# EAGLE board MAG3110_Breakout-Panel-v12 (EAGLE 7.5.0), part 1 of 6
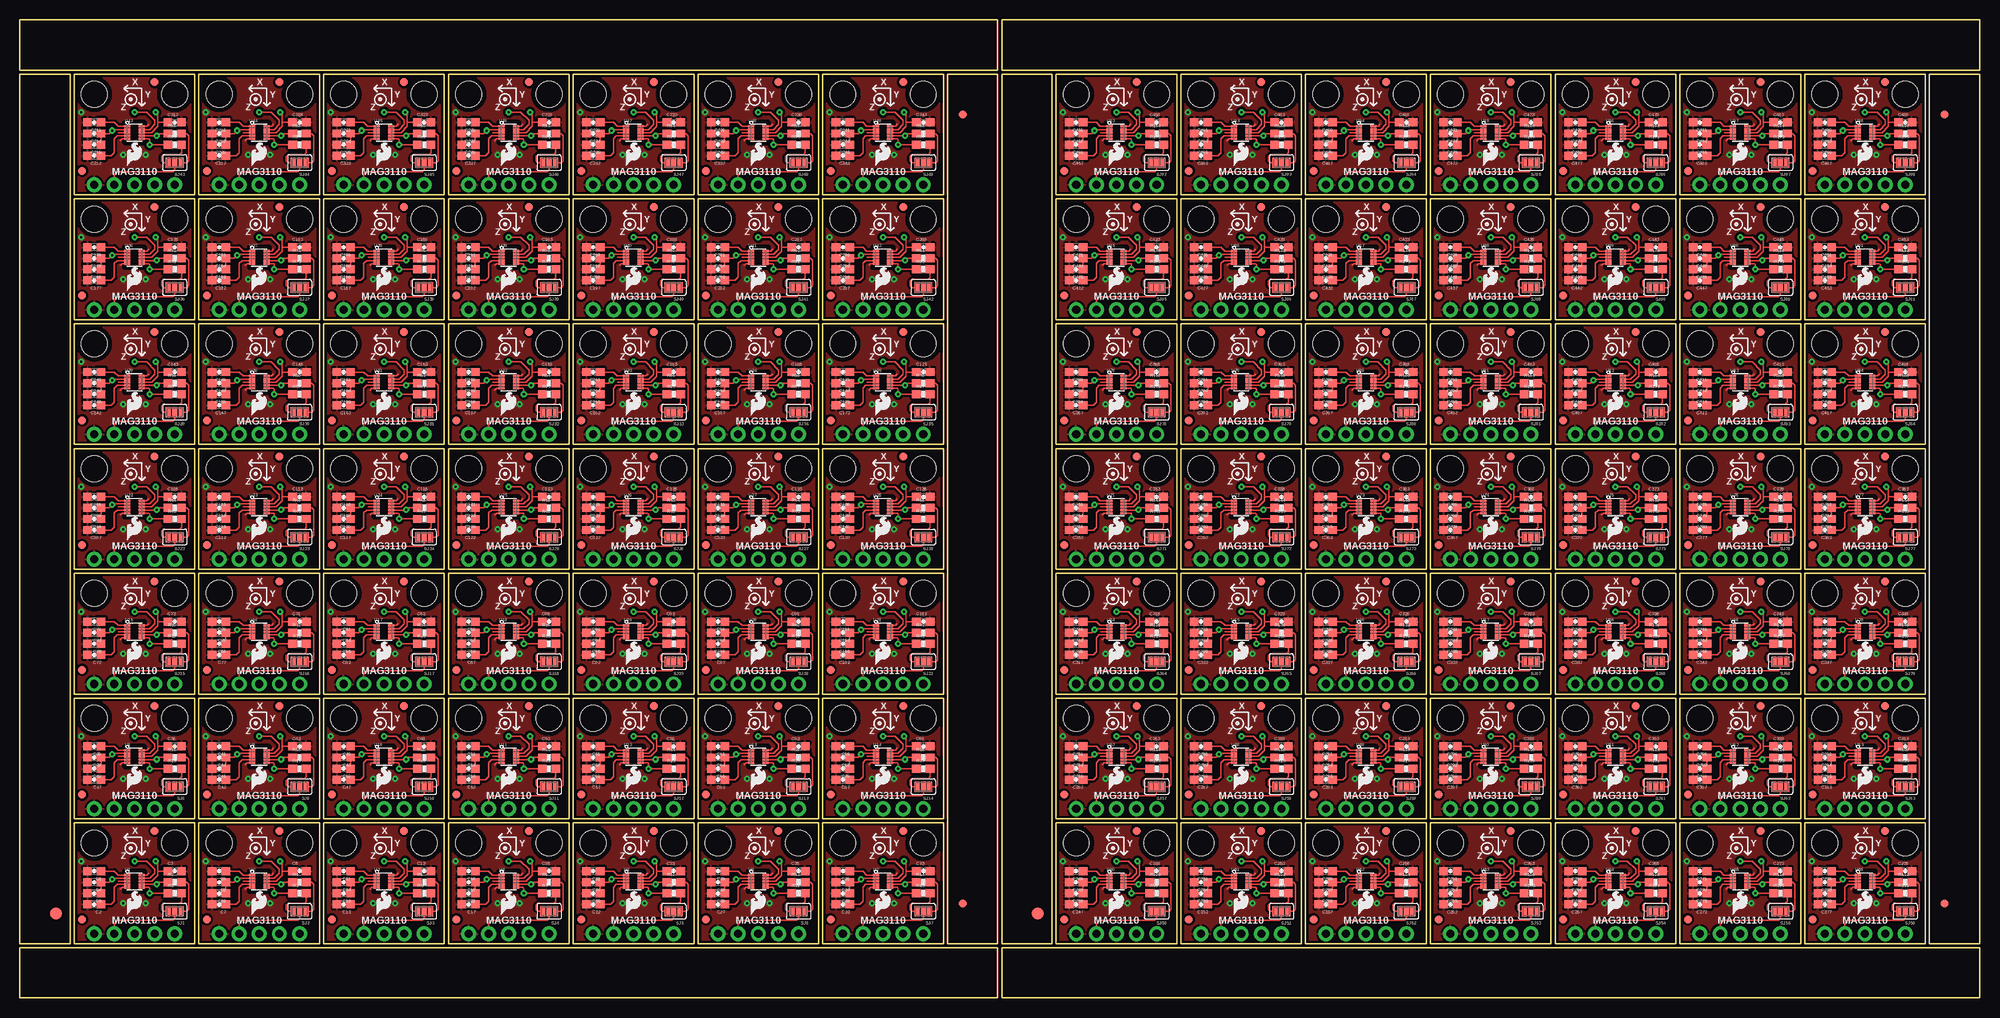
[diagram p0: board, top side]
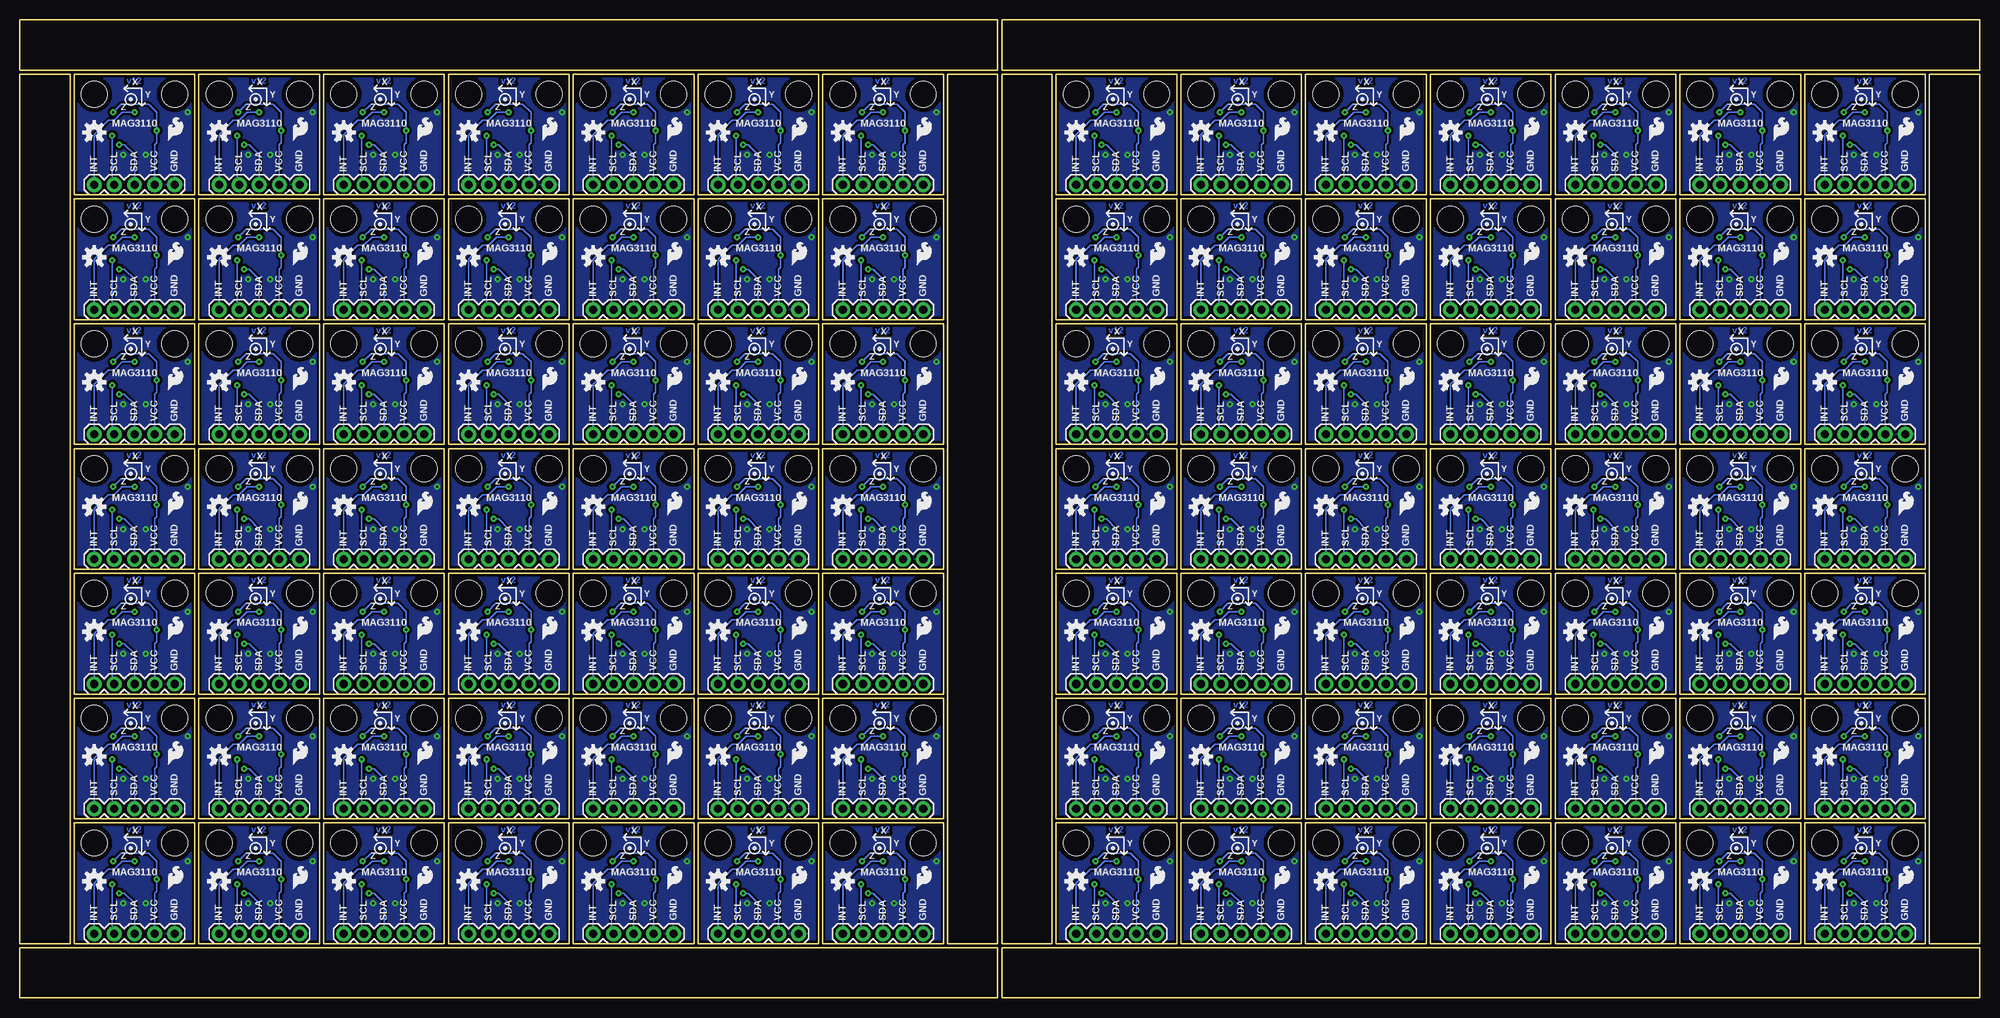
[diagram p1: board, bottom side, seen from below]

Size 247.4 x 123.44 mm. Coordinates in mm from the lower left corner, seen from the top.
Outline: 424 segments
Copper layers (1*16): Top 0.035mm / dielectric 1.5mm / Bottom 0.035mm
Design rules "SparkFun-2-layer *": minimum track width 7mil, minimum drill 10mil, track to track 8mil, track to pad 8mil, pad to pad 8mil, via to via 8mil, smd to smd 8mil, copper to edge 8mil, drill to drill 8mil, minimum pad ring 12mil, minimum via ring 10mil, stop-mask expansion 4mil, vias tented up to drill 20mil, thermal gap 10mil
tRestrict: area 14.1,13.7 to 14.9,15.7; area 13.2,15.9 to 15.7,16; area 13.2,13.5 to 15.7,13.6; area 29.8,13.7 to 30.6,15.7; area 29,15.9 to 31.5,16; area 29,13.5 to 31.5,13.6; area 45.6,13.7 to 46.4,15.7; area 44.7,15.9 to 47.2,16; area 44.7,13.5 to 47.2,13.6; area 61.3,13.7 to 62.1,15.7; area 60.5,15.9 to 63,16; area 60.5,13.5 to 63,13.6; 282 more areas

## Footprints (pad centres in the part's own frame; a part is rotated, then mirrored left to right if it is on the bottom)
0603-CAP = smd 1.1 x 1: 1 -0.85,0; 2 0.85,0
FIDUCIAL-1.5X3 = smd 1.5 x 1.5: 1 0,0
FIDUCIAL-1X2 = smd 1 x 1: 1 0,0
1X05 = drill 1.016 pad 1.88: 1 0,0; 2 2.54,0; 3 5.08,0; 4 7.62,0; 5 10.16,0
STAND-OFF = hole 3.302: 0,0
0603-RES = smd 1.1 x 1: 1 -0.85,0; 2 0.85,0
SJ_3_PASTE1&2&3 = smd 0.635 x 1.27: 1 -0.813,0; 2 0,0; 3 0.813,0
DFN-10-W = smd 0.762 x 0.279: 1 -0.91,0.787; 2 -0.91,0.381; 3 -0.91,0; 4 -0.91,-0.406; 5 -0.91,-0.787; 6 0.91,-0.787; 7 0.91,-0.406; 8 0.91,0; 9 0.91,0.381; 10 0.91,0.787

## Placement (x,y rotation side)
C1  0.1uF  [0603-CAP]  9.4,16 180 top
C2  0.1uF  [0603-CAP]  9.4,11.81 180 top
C3  0.1uF  [0603-CAP]  19.56,16 0 top
C4  1uF  [0603-CAP]  9.4,14.61 180 top
C5  0.1uF  [0603-CAP]  9.4,13.21 180 top
C6  0.1uF  [0603-CAP]  25.15,16 180 top
C7  0.1uF  [0603-CAP]  25.15,11.81 180 top
C8  0.1uF  [0603-CAP]  35.31,16 0 top
C9  1uF  [0603-CAP]  25.15,14.61 180 top
C10  0.1uF  [0603-CAP]  25.15,13.21 180 top
C11  0.1uF  [0603-CAP]  40.89,16 180 top
C12  0.1uF  [0603-CAP]  40.89,11.81 180 top
C13  0.1uF  [0603-CAP]  51.05,16 0 top
C14  1uF  [0603-CAP]  40.89,14.61 180 top
C15  0.1uF  [0603-CAP]  40.89,13.21 180 top
C16  0.1uF  [0603-CAP]  56.64,16 180 top
C17  0.1uF  [0603-CAP]  56.64,11.81 180 top
C18  0.1uF  [0603-CAP]  66.8,16 0 top
C19  1uF  [0603-CAP]  56.64,14.61 180 top
C20  0.1uF  [0603-CAP]  56.64,13.21 180 top
C21  0.1uF  [0603-CAP]  72.39,16 180 top
C22  0.1uF  [0603-CAP]  72.39,11.81 180 top
C23  0.1uF  [0603-CAP]  82.55,16 0 top
C24  1uF  [0603-CAP]  72.39,14.61 180 top
C25  0.1uF  [0603-CAP]  72.39,13.21 180 top
C26  0.1uF  [0603-CAP]  88.14,16 180 top
C27  0.1uF  [0603-CAP]  88.14,11.81 180 top
C28  0.1uF  [0603-CAP]  98.3,16 0 top
C29  1uF  [0603-CAP]  88.14,14.61 180 top
C30  0.1uF  [0603-CAP]  88.14,13.21 180 top
C31  0.1uF  [0603-CAP]  103.89,16 180 top
C32  0.1uF  [0603-CAP]  103.89,11.81 180 top
C33  0.1uF  [0603-CAP]  114.05,16 0 top
C34  1uF  [0603-CAP]  103.89,14.61 180 top
C35  0.1uF  [0603-CAP]  103.89,13.21 180 top
C36  0.1uF  [0603-CAP]  9.4,31.75 180 top
C37  0.1uF  [0603-CAP]  9.4,27.56 180 top
C38  0.1uF  [0603-CAP]  19.56,31.75 0 top
C39  1uF  [0603-CAP]  9.4,30.35 180 top
C40  0.1uF  [0603-CAP]  9.4,28.96 180 top
C41  0.1uF  [0603-CAP]  25.15,31.75 180 top
C42  0.1uF  [0603-CAP]  25.15,27.56 180 top
C43  0.1uF  [0603-CAP]  35.31,31.75 0 top
C44  1uF  [0603-CAP]  25.15,30.35 180 top
C45  0.1uF  [0603-CAP]  25.15,28.96 180 top
C46  0.1uF  [0603-CAP]  40.89,31.75 180 top
C47  0.1uF  [0603-CAP]  40.89,27.56 180 top
C48  0.1uF  [0603-CAP]  51.05,31.75 0 top
C49  1uF  [0603-CAP]  40.89,30.35 180 top
C50  0.1uF  [0603-CAP]  40.89,28.96 180 top
C51  0.1uF  [0603-CAP]  56.64,31.75 180 top
C52  0.1uF  [0603-CAP]  56.64,27.56 180 top
C53  0.1uF  [0603-CAP]  66.8,31.75 0 top
C54  1uF  [0603-CAP]  56.64,30.35 180 top
C55  0.1uF  [0603-CAP]  56.64,28.96 180 top
C56  0.1uF  [0603-CAP]  72.39,31.75 180 top
C57  0.1uF  [0603-CAP]  72.39,27.56 180 top
C58  0.1uF  [0603-CAP]  82.55,31.75 0 top
C59  1uF  [0603-CAP]  72.39,30.35 180 top
C60  0.1uF  [0603-CAP]  72.39,28.96 180 top
C61  0.1uF  [0603-CAP]  88.14,31.75 180 top
C62  0.1uF  [0603-CAP]  88.14,27.56 180 top
C63  0.1uF  [0603-CAP]  98.3,31.75 0 top
C64  1uF  [0603-CAP]  88.14,30.35 180 top
C65  0.1uF  [0603-CAP]  88.14,28.96 180 top
C66  0.1uF  [0603-CAP]  103.89,31.75 180 top
C67  0.1uF  [0603-CAP]  103.89,27.56 180 top
C68  0.1uF  [0603-CAP]  114.05,31.75 0 top
C69  1uF  [0603-CAP]  103.89,30.35 180 top
C70  0.1uF  [0603-CAP]  103.89,28.96 180 top
C71  0.1uF  [0603-CAP]  9.4,47.5 180 top
C72  0.1uF  [0603-CAP]  9.4,43.31 180 top
C73  0.1uF  [0603-CAP]  19.56,47.5 0 top
C74  1uF  [0603-CAP]  9.4,46.1 180 top
C75  0.1uF  [0603-CAP]  9.4,44.7 180 top
C76  0.1uF  [0603-CAP]  25.15,47.5 180 top
C77  0.1uF  [0603-CAP]  25.15,43.31 180 top
C78  0.1uF  [0603-CAP]  35.31,47.5 0 top
C79  1uF  [0603-CAP]  25.15,46.1 180 top
C80  0.1uF  [0603-CAP]  25.15,44.7 180 top
C81  0.1uF  [0603-CAP]  40.89,47.5 180 top
C82  0.1uF  [0603-CAP]  40.89,43.31 180 top
C83  0.1uF  [0603-CAP]  51.05,47.5 0 top
C84  1uF  [0603-CAP]  40.89,46.1 180 top
C85  0.1uF  [0603-CAP]  40.89,44.7 180 top
C86  0.1uF  [0603-CAP]  56.64,47.5 180 top
C87  0.1uF  [0603-CAP]  56.64,43.31 180 top
C88  0.1uF  [0603-CAP]  66.8,47.5 0 top
C89  1uF  [0603-CAP]  56.64,46.1 180 top
C90  0.1uF  [0603-CAP]  56.64,44.7 180 top
C91  0.1uF  [0603-CAP]  72.39,47.5 180 top
C92  0.1uF  [0603-CAP]  72.39,43.31 180 top
C93  0.1uF  [0603-CAP]  82.55,47.5 0 top
C94  1uF  [0603-CAP]  72.39,46.1 180 top
C95  0.1uF  [0603-CAP]  72.39,44.7 180 top
C96  0.1uF  [0603-CAP]  88.14,47.5 180 top
C97  0.1uF  [0603-CAP]  88.14,43.31 180 top
C98  0.1uF  [0603-CAP]  98.3,47.5 0 top
C99  1uF  [0603-CAP]  88.14,46.1 180 top
C100  0.1uF  [0603-CAP]  88.14,44.7 180 top
C101  0.1uF  [0603-CAP]  103.89,47.5 180 top
C102  0.1uF  [0603-CAP]  103.89,43.31 180 top
C103  0.1uF  [0603-CAP]  114.05,47.5 0 top
C104  1uF  [0603-CAP]  103.89,46.1 180 top
C105  0.1uF  [0603-CAP]  103.89,44.7 180 top
C106  0.1uF  [0603-CAP]  9.4,63.25 180 top
C107  0.1uF  [0603-CAP]  9.4,59.05 180 top
C108  0.1uF  [0603-CAP]  19.56,63.25 0 top
C109  1uF  [0603-CAP]  9.4,61.85 180 top
C110  0.1uF  [0603-CAP]  9.4,60.45 180 top
C111  0.1uF  [0603-CAP]  25.15,63.25 180 top
C112  0.1uF  [0603-CAP]  25.15,59.05 180 top
C113  0.1uF  [0603-CAP]  35.31,63.25 0 top
C114  1uF  [0603-CAP]  25.15,61.85 180 top
C115  0.1uF  [0603-CAP]  25.15,60.45 180 top
C116  0.1uF  [0603-CAP]  40.89,63.25 180 top
C117  0.1uF  [0603-CAP]  40.89,59.05 180 top
C118  0.1uF  [0603-CAP]  51.05,63.25 0 top
C119  1uF  [0603-CAP]  40.89,61.85 180 top
C120  0.1uF  [0603-CAP]  40.89,60.45 180 top
C121  0.1uF  [0603-CAP]  56.64,63.25 180 top
C122  0.1uF  [0603-CAP]  56.64,59.05 180 top
C123  0.1uF  [0603-CAP]  66.8,63.25 0 top
C124  1uF  [0603-CAP]  56.64,61.85 180 top
C125  0.1uF  [0603-CAP]  56.64,60.45 180 top
C126  0.1uF  [0603-CAP]  72.39,63.25 180 top
C127  0.1uF  [0603-CAP]  72.39,59.05 180 top
C128  0.1uF  [0603-CAP]  82.55,63.25 0 top
C129  1uF  [0603-CAP]  72.39,61.85 180 top
C130  0.1uF  [0603-CAP]  72.39,60.45 180 top
C131  0.1uF  [0603-CAP]  88.14,63.25 180 top
C132  0.1uF  [0603-CAP]  88.14,59.05 180 top
C133  0.1uF  [0603-CAP]  98.3,63.25 0 top
C134  1uF  [0603-CAP]  88.14,61.85 180 top
C135  0.1uF  [0603-CAP]  88.14,60.45 180 top
C136  0.1uF  [0603-CAP]  103.89,63.25 180 top
C137  0.1uF  [0603-CAP]  103.89,59.05 180 top
C138  0.1uF  [0603-CAP]  114.05,63.25 0 top
C139  1uF  [0603-CAP]  103.89,61.85 180 top
C140  0.1uF  [0603-CAP]  103.89,60.45 180 top
C141  0.1uF  [0603-CAP]  9.4,78.99 180 top
C142  0.1uF  [0603-CAP]  9.4,74.8 180 top
C143  0.1uF  [0603-CAP]  19.56,78.99 0 top
C144  1uF  [0603-CAP]  9.4,77.6 180 top
C145  0.1uF  [0603-CAP]  9.4,76.2 180 top
C146  0.1uF  [0603-CAP]  25.15,78.99 180 top
C147  0.1uF  [0603-CAP]  25.15,74.8 180 top
C148  0.1uF  [0603-CAP]  35.31,78.99 0 top
C149  1uF  [0603-CAP]  25.15,77.6 180 top
C150  0.1uF  [0603-CAP]  25.15,76.2 180 top
C151  0.1uF  [0603-CAP]  40.89,78.99 180 top
C152  0.1uF  [0603-CAP]  40.89,74.8 180 top
C153  0.1uF  [0603-CAP]  51.05,78.99 0 top
C154  1uF  [0603-CAP]  40.89,77.6 180 top
C155  0.1uF  [0603-CAP]  40.89,76.2 180 top
C156  0.1uF  [0603-CAP]  56.64,78.99 180 top
C157  0.1uF  [0603-CAP]  56.64,74.8 180 top
C158  0.1uF  [0603-CAP]  66.8,78.99 0 top
C159  1uF  [0603-CAP]  56.64,77.6 180 top
C160  0.1uF  [0603-CAP]  56.64,76.2 180 top
C161  0.1uF  [0603-CAP]  72.39,78.99 180 top
C162  0.1uF  [0603-CAP]  72.39,74.8 180 top
C163  0.1uF  [0603-CAP]  82.55,78.99 0 top
C164  1uF  [0603-CAP]  72.39,77.6 180 top
C165  0.1uF  [0603-CAP]  72.39,76.2 180 top
C166  0.1uF  [0603-CAP]  88.14,78.99 180 top
C167  0.1uF  [0603-CAP]  88.14,74.8 180 top
C168  0.1uF  [0603-CAP]  98.3,78.99 0 top
C169  1uF  [0603-CAP]  88.14,77.6 180 top
C170  0.1uF  [0603-CAP]  88.14,76.2 180 top
C171  0.1uF  [0603-CAP]  103.89,78.99 180 top
C172  0.1uF  [0603-CAP]  103.89,74.8 180 top
C173  0.1uF  [0603-CAP]  114.05,78.99 0 top
C174  1uF  [0603-CAP]  103.89,77.6 180 top
C175  0.1uF  [0603-CAP]  103.89,76.2 180 top
C176  0.1uF  [0603-CAP]  9.4,94.74 180 top
C177  0.1uF  [0603-CAP]  9.4,90.55 180 top
C178  0.1uF  [0603-CAP]  19.56,94.74 0 top
C179  1uF  [0603-CAP]  9.4,93.34 180 top
C180  0.1uF  [0603-CAP]  9.4,91.95 180 top
C181  0.1uF  [0603-CAP]  25.15,94.74 180 top
C182  0.1uF  [0603-CAP]  25.15,90.55 180 top
C183  0.1uF  [0603-CAP]  35.31,94.74 0 top
C184  1uF  [0603-CAP]  25.15,93.34 180 top
C185  0.1uF  [0603-CAP]  25.15,91.95 180 top
C186  0.1uF  [0603-CAP]  40.89,94.74 180 top
C187  0.1uF  [0603-CAP]  40.89,90.55 180 top
C188  0.1uF  [0603-CAP]  51.05,94.74 0 top
C189  1uF  [0603-CAP]  40.89,93.34 180 top
C190  0.1uF  [0603-CAP]  40.89,91.95 180 top
C191  0.1uF  [0603-CAP]  56.64,94.74 180 top
C192  0.1uF  [0603-CAP]  56.64,90.55 180 top
C193  0.1uF  [0603-CAP]  66.8,94.74 0 top
C194  1uF  [0603-CAP]  56.64,93.34 180 top
C195  0.1uF  [0603-CAP]  56.64,91.95 180 top
C196  0.1uF  [0603-CAP]  72.39,94.74 180 top
C197  0.1uF  [0603-CAP]  72.39,90.55 180 top
C198  0.1uF  [0603-CAP]  82.55,94.74 0 top
C199  1uF  [0603-CAP]  72.39,93.34 180 top
C200  0.1uF  [0603-CAP]  72.39,91.95 180 top
C201  0.1uF  [0603-CAP]  88.14,94.74 180 top
C202  0.1uF  [0603-CAP]  88.14,90.55 180 top
C203  0.1uF  [0603-CAP]  98.3,94.74 0 top
C204  1uF  [0603-CAP]  88.14,93.34 180 top
C205  0.1uF  [0603-CAP]  88.14,91.95 180 top
C206  0.1uF  [0603-CAP]  103.89,94.74 180 top
C207  0.1uF  [0603-CAP]  103.89,90.55 180 top
C208  0.1uF  [0603-CAP]  114.05,94.74 0 top
C209  1uF  [0603-CAP]  103.89,93.34 180 top
C210  0.1uF  [0603-CAP]  103.89,91.95 180 top
C211  0.1uF  [0603-CAP]  9.4,110.49 180 top
C212  0.1uF  [0603-CAP]  9.4,106.3 180 top
C213  0.1uF  [0603-CAP]  19.56,110.49 0 top
C214  1uF  [0603-CAP]  9.4,109.09 180 top
C215  0.1uF  [0603-CAP]  9.4,107.7 180 top
C216  0.1uF  [0603-CAP]  25.15,110.49 180 top
C217  0.1uF  [0603-CAP]  25.15,106.3 180 top
C218  0.1uF  [0603-CAP]  35.31,110.49 0 top
C219  1uF  [0603-CAP]  25.15,109.09 180 top
C220  0.1uF  [0603-CAP]  25.15,107.7 180 top
C221  0.1uF  [0603-CAP]  40.89,110.49 180 top
C222  0.1uF  [0603-CAP]  40.89,106.3 180 top
C223  0.1uF  [0603-CAP]  51.05,110.49 0 top
C224  1uF  [0603-CAP]  40.89,109.09 180 top
C225  0.1uF  [0603-CAP]  40.89,107.7 180 top
C226  0.1uF  [0603-CAP]  56.64,110.49 180 top
C227  0.1uF  [0603-CAP]  56.64,106.3 180 top
C228  0.1uF  [0603-CAP]  66.8,110.49 0 top
C229  1uF  [0603-CAP]  56.64,109.09 180 top
C230  0.1uF  [0603-CAP]  56.64,107.7 180 top
C231  0.1uF  [0603-CAP]  72.39,110.49 180 top
C232  0.1uF  [0603-CAP]  72.39,106.3 180 top
C233  0.1uF  [0603-CAP]  82.55,110.49 0 top
C234  1uF  [0603-CAP]  72.39,109.09 180 top
C235  0.1uF  [0603-CAP]  72.39,107.7 180 top
C236  0.1uF  [0603-CAP]  88.14,110.49 180 top
C237  0.1uF  [0603-CAP]  88.14,106.3 180 top
C238  0.1uF  [0603-CAP]  98.3,110.49 0 top
C239  1uF  [0603-CAP]  88.14,109.09 180 top
C240  0.1uF  [0603-CAP]  88.14,107.7 180 top
C241  0.1uF  [0603-CAP]  103.89,110.49 180 top
C242  0.1uF  [0603-CAP]  103.89,106.3 180 top
C243  0.1uF  [0603-CAP]  114.05,110.49 0 top
C244  1uF  [0603-CAP]  103.89,109.09 180 top
C245  0.1uF  [0603-CAP]  103.89,107.7 180 top
C246  0.1uF  [0603-CAP]  133.35,16 180 top
C247  0.1uF  [0603-CAP]  133.35,11.81 180 top
C248  0.1uF  [0603-CAP]  143.51,16 0 top
C249  1uF  [0603-CAP]  133.35,14.61 180 top
C250  0.1uF  [0603-CAP]  133.35,13.21 180 top
C251  0.1uF  [0603-CAP]  149.1,16 180 top
C252  0.1uF  [0603-CAP]  149.1,11.81 180 top
C253  0.1uF  [0603-CAP]  159.26,16 0 top
C254  1uF  [0603-CAP]  149.1,14.61 180 top
C255  0.1uF  [0603-CAP]  149.1,13.21 180 top
C256  0.1uF  [0603-CAP]  164.85,16 180 top
C257  0.1uF  [0603-CAP]  164.85,11.81 180 top
C258  0.1uF  [0603-CAP]  175.01,16 0 top
C259  1uF  [0603-CAP]  164.85,14.61 180 top
C260  0.1uF  [0603-CAP]  164.85,13.21 180 top
C261  0.1uF  [0603-CAP]  180.59,16 180 top
C262  0.1uF  [0603-CAP]  180.59,11.81 180 top
C263  0.1uF  [0603-CAP]  190.75,16 0 top
C264  1uF  [0603-CAP]  180.59,14.61 180 top
C265  0.1uF  [0603-CAP]  180.59,13.21 180 top
C266  0.1uF  [0603-CAP]  196.34,16 180 top
C267  0.1uF  [0603-CAP]  196.34,11.81 180 top
C268  0.1uF  [0603-CAP]  206.5,16 0 top
C269  1uF  [0603-CAP]  196.34,14.61 180 top
C270  0.1uF  [0603-CAP]  196.34,13.21 180 top
C271  0.1uF  [0603-CAP]  212.09,16 180 top
C272  0.1uF  [0603-CAP]  212.09,11.81 180 top
C273  0.1uF  [0603-CAP]  222.25,16 0 top
C274  1uF  [0603-CAP]  212.09,14.61 180 top
C275  0.1uF  [0603-CAP]  212.09,13.21 180 top
C276  0.1uF  [0603-CAP]  227.84,16 180 top
C277  0.1uF  [0603-CAP]  227.84,11.81 180 top
C278  0.1uF  [0603-CAP]  238,16 0 top
C279  1uF  [0603-CAP]  227.84,14.61 180 top
C280  0.1uF  [0603-CAP]  227.84,13.21 180 top
C281  0.1uF  [0603-CAP]  133.35,31.75 180 top
C282  0.1uF  [0603-CAP]  133.35,27.56 180 top
C283  0.1uF  [0603-CAP]  143.51,31.75 0 top
C284  1uF  [0603-CAP]  133.35,30.35 180 top
C285  0.1uF  [0603-CAP]  133.35,28.96 180 top
C286  0.1uF  [0603-CAP]  149.1,31.75 180 top
C287  0.1uF  [0603-CAP]  149.1,27.56 180 top
C288  0.1uF  [0603-CAP]  159.26,31.75 0 top
C289  1uF  [0603-CAP]  149.1,30.35 180 top
C290  0.1uF  [0603-CAP]  149.1,28.96 180 top
C291  0.1uF  [0603-CAP]  164.85,31.75 180 top
C292  0.1uF  [0603-CAP]  164.85,27.56 180 top
C293  0.1uF  [0603-CAP]  175.01,31.75 0 top
C294  1uF  [0603-CAP]  164.85,30.35 180 top
C295  0.1uF  [0603-CAP]  164.85,28.96 180 top
C296  0.1uF  [0603-CAP]  180.59,31.75 180 top
C297  0.1uF  [0603-CAP]  180.59,27.56 180 top
C298  0.1uF  [0603-CAP]  190.75,31.75 0 top
C299  1uF  [0603-CAP]  180.59,30.35 180 top
C300  0.1uF  [0603-CAP]  180.59,28.96 180 top
C301  0.1uF  [0603-CAP]  196.34,31.75 180 top
C302  0.1uF  [0603-CAP]  196.34,27.56 180 top
C303  0.1uF  [0603-CAP]  206.5,31.75 0 top
C304  1uF  [0603-CAP]  196.34,30.35 180 top
C305  0.1uF  [0603-CAP]  196.34,28.96 180 top
C306  0.1uF  [0603-CAP]  212.09,31.75 180 top
C307  0.1uF  [0603-CAP]  212.09,27.56 180 top
C308  0.1uF  [0603-CAP]  222.25,31.75 0 top
C309  1uF  [0603-CAP]  212.09,30.35 180 top
C310  0.1uF  [0603-CAP]  212.09,28.96 180 top
C311  0.1uF  [0603-CAP]  227.84,31.75 180 top
C312  0.1uF  [0603-CAP]  227.84,27.56 180 top
C313  0.1uF  [0603-CAP]  238,31.75 0 top
C314  1uF  [0603-CAP]  227.84,30.35 180 top
C315  0.1uF  [0603-CAP]  227.84,28.96 180 top
C316  0.1uF  [0603-CAP]  133.35,47.5 180 top
C317  0.1uF  [0603-CAP]  133.35,43.31 180 top
C318  0.1uF  [0603-CAP]  143.51,47.5 0 top
C319  1uF  [0603-CAP]  133.35,46.1 180 top
C320  0.1uF  [0603-CAP]  133.35,44.7 180 top
C321  0.1uF  [0603-CAP]  149.1,47.5 180 top
C322  0.1uF  [0603-CAP]  149.1,43.31 180 top
C323  0.1uF  [0603-CAP]  159.26,47.5 0 top
C324  1uF  [0603-CAP]  149.1,46.1 180 top
C325  0.1uF  [0603-CAP]  149.1,44.7 180 top
C326  0.1uF  [0603-CAP]  164.85,47.5 180 top
C327  0.1uF  [0603-CAP]  164.85,43.31 180 top
C328  0.1uF  [0603-CAP]  175.01,47.5 0 top
C329  1uF  [0603-CAP]  164.85,46.1 180 top
C330  0.1uF  [0603-CAP]  164.85,44.7 180 top
C331  0.1uF  [0603-CAP]  180.59,47.5 180 top
C332  0.1uF  [0603-CAP]  180.59,43.31 180 top
C333  0.1uF  [0603-CAP]  190.75,47.5 0 top
C334  1uF  [0603-CAP]  180.59,46.1 180 top
C335  0.1uF  [0603-CAP]  180.59,44.7 180 top
C336  0.1uF  [0603-CAP]  196.34,47.5 180 top
C337  0.1uF  [0603-CAP]  196.34,43.31 180 top
C338  0.1uF  [0603-CAP]  206.5,47.5 0 top
C339  1uF  [0603-CAP]  196.34,46.1 180 top
C340  0.1uF  [0603-CAP]  196.34,44.7 180 top
C341  0.1uF  [0603-CAP]  212.09,47.5 180 top
C342  0.1uF  [0603-CAP]  212.09,43.31 180 top
C343  0.1uF  [0603-CAP]  222.25,47.5 0 top
C344  1uF  [0603-CAP]  212.09,46.1 180 top
C345  0.1uF  [0603-CAP]  212.09,44.7 180 top
C346  0.1uF  [0603-CAP]  227.84,47.5 180 top
C347  0.1uF  [0603-CAP]  227.84,43.31 180 top
C348  0.1uF  [0603-CAP]  238,47.5 0 top
C349  1uF  [0603-CAP]  227.84,46.1 180 top
C350  0.1uF  [0603-CAP]  227.84,44.7 180 top
C351  0.1uF  [0603-CAP]  133.35,63.25 180 top
C352  0.1uF  [0603-CAP]  133.35,59.05 180 top
C353  0.1uF  [0603-CAP]  143.51,63.25 0 top
C354  1uF  [0603-CAP]  133.35,61.85 180 top
C355  0.1uF  [0603-CAP]  133.35,60.45 180 top
C356  0.1uF  [0603-CAP]  149.1,63.25 180 top
C357  0.1uF  [0603-CAP]  149.1,59.05 180 top
C358  0.1uF  [0603-CAP]  159.26,63.25 0 top
C359  1uF  [0603-CAP]  149.1,61.85 180 top
C360  0.1uF  [0603-CAP]  149.1,60.45 180 top
C361  0.1uF  [0603-CAP]  164.85,63.25 180 top
C362  0.1uF  [0603-CAP]  164.85,59.05 180 top
C363  0.1uF  [0603-CAP]  175.01,63.25 0 top
C364  1uF  [0603-CAP]  164.85,61.85 180 top
C365  0.1uF  [0603-CAP]  164.85,60.45 180 top
C366  0.1uF  [0603-CAP]  180.59,63.25 180 top
C367  0.1uF  [0603-CAP]  180.59,59.05 180 top
C368  0.1uF  [0603-CAP]  190.75,63.25 0 top
C369  1uF  [0603-CAP]  180.59,61.85 180 top
C370  0.1uF  [0603-CAP]  180.59,60.45 180 top
C371  0.1uF  [0603-CAP]  196.34,63.25 180 top
C372  0.1uF  [0603-CAP]  196.34,59.05 180 top
C373  0.1uF  [0603-CAP]  206.5,63.25 0 top
C374  1uF  [0603-CAP]  196.34,61.85 180 top
C375  0.1uF  [0603-CAP]  196.34,60.45 180 top
C376  0.1uF  [0603-CAP]  212.09,63.25 180 top
C377  0.1uF  [0603-CAP]  212.09,59.05 180 top
C378  0.1uF  [0603-CAP]  222.25,63.25 0 top
C379  1uF  [0603-CAP]  212.09,61.85 180 top
C380  0.1uF  [0603-CAP]  212.09,60.45 180 top
C381  0.1uF  [0603-CAP]  227.84,63.25 180 top
C382  0.1uF  [0603-CAP]  227.84,59.05 180 top
C383  0.1uF  [0603-CAP]  238,63.25 0 top
C384  1uF  [0603-CAP]  227.84,61.85 180 top
C385  0.1uF  [0603-CAP]  227.84,60.45 180 top
C386  0.1uF  [0603-CAP]  133.35,78.99 180 top
C387  0.1uF  [0603-CAP]  133.35,74.8 180 top
C388  0.1uF  [0603-CAP]  143.51,78.99 0 top
C389  1uF  [0603-CAP]  133.35,77.6 180 top
C390  0.1uF  [0603-CAP]  133.35,76.2 180 top
C391  0.1uF  [0603-CAP]  149.1,78.99 180 top
C392  0.1uF  [0603-CAP]  149.1,74.8 180 top
C393  0.1uF  [0603-CAP]  159.26,78.99 0 top
C394  1uF  [0603-CAP]  149.1,77.6 180 top
C395  0.1uF  [0603-CAP]  149.1,76.2 180 top
C396  0.1uF  [0603-CAP]  164.85,78.99 180 top
C397  0.1uF  [0603-CAP]  164.85,74.8 180 top
C398  0.1uF  [0603-CAP]  175.01,78.99 0 top
C399  1uF  [0603-CAP]  164.85,77.6 180 top
C400  0.1uF  [0603-CAP]  164.85,76.2 180 top
C401  0.1uF  [0603-CAP]  180.59,78.99 180 top
C402  0.1uF  [0603-CAP]  180.59,74.8 180 top
C403  0.1uF  [0603-CAP]  190.75,78.99 0 top
C404  1uF  [0603-CAP]  180.59,77.6 180 top
C405  0.1uF  [0603-CAP]  180.59,76.2 180 top
C406  0.1uF  [0603-CAP]  196.34,78.99 180 top
C407  0.1uF  [0603-CAP]  196.34,74.8 180 top
C408  0.1uF  [0603-CAP]  206.5,78.99 0 top
C409  1uF  [0603-CAP]  196.34,77.6 180 top
C410  0.1uF  [0603-CAP]  196.34,76.2 180 top
C411  0.1uF  [0603-CAP]  212.09,78.99 180 top
C412  0.1uF  [0603-CAP]  212.09,74.8 180 top
C413  0.1uF  [0603-CAP]  222.25,78.99 0 top
C414  1uF  [0603-CAP]  212.09,77.6 180 top
C415  0.1uF  [0603-CAP]  212.09,76.2 180 top
C416  0.1uF  [0603-CAP]  227.84,78.99 180 top
C417  0.1uF  [0603-CAP]  227.84,74.8 180 top
C418  0.1uF  [0603-CAP]  238,78.99 0 top
C419  1uF  [0603-CAP]  227.84,77.6 180 top
C420  0.1uF  [0603-CAP]  227.84,76.2 180 top
C421  0.1uF  [0603-CAP]  133.35,94.74 180 top
C422  0.1uF  [0603-CAP]  133.35,90.55 180 top
C423  0.1uF  [0603-CAP]  143.51,94.74 0 top
C424  1uF  [0603-CAP]  133.35,93.34 180 top
C425  0.1uF  [0603-CAP]  133.35,91.95 180 top
C426  0.1uF  [0603-CAP]  149.1,94.74 180 top
C427  0.1uF  [0603-CAP]  149.1,90.55 180 top
C428  0.1uF  [0603-CAP]  159.26,94.74 0 top
C429  1uF  [0603-CAP]  149.1,93.34 180 top
C430  0.1uF  [0603-CAP]  149.1,91.95 180 top
C431  0.1uF  [0603-CAP]  164.85,94.74 180 top
C432  0.1uF  [0603-CAP]  164.85,90.55 180 top
C433  0.1uF  [0603-CAP]  175.01,94.74 0 top
C434  1uF  [0603-CAP]  164.85,93.34 180 top
C435  0.1uF  [0603-CAP]  164.85,91.95 180 top
C436  0.1uF  [0603-CAP]  180.59,94.74 180 top
C437  0.1uF  [0603-CAP]  180.59,90.55 180 top
C438  0.1uF  [0603-CAP]  190.75,94.74 0 top
C439  1uF  [0603-CAP]  180.59,93.34 180 top
C440  0.1uF  [0603-CAP]  180.59,91.95 180 top
C441  0.1uF  [0603-CAP]  196.34,94.74 180 top
C442  0.1uF  [0603-CAP]  196.34,90.55 180 top
C443  0.1uF  [0603-CAP]  206.5,94.74 0 top
C444  1uF  [0603-CAP]  196.34,93.34 180 top
C445  0.1uF  [0603-CAP]  196.34,91.95 180 top
C446  0.1uF  [0603-CAP]  212.09,94.74 180 top
C447  0.1uF  [0603-CAP]  212.09,90.55 180 top
C448  0.1uF  [0603-CAP]  222.25,94.74 0 top
C449  1uF  [0603-CAP]  212.09,93.34 180 top
C450  0.1uF  [0603-CAP]  212.09,91.95 180 top
C451  0.1uF  [0603-CAP]  227.84,94.74 180 top
C452  0.1uF  [0603-CAP]  227.84,90.55 180 top
C453  0.1uF  [0603-CAP]  238,94.74 0 top
C454  1uF  [0603-CAP]  227.84,93.34 180 top
C455  0.1uF  [0603-CAP]  227.84,91.95 180 top
C456  0.1uF  [0603-CAP]  133.35,110.49 180 top
C457  0.1uF  [0603-CAP]  133.35,106.3 180 top
C458  0.1uF  [0603-CAP]  143.51,110.49 0 top
C459  1uF  [0603-CAP]  133.35,109.09 180 top
C460  0.1uF  [0603-CAP]  133.35,107.7 180 top
C461  0.1uF  [0603-CAP]  149.1,110.49 180 top
C462  0.1uF  [0603-CAP]  149.1,106.3 180 top
C463  0.1uF  [0603-CAP]  159.26,110.49 0 top
C464  1uF  [0603-CAP]  149.1,109.09 180 top
C465  0.1uF  [0603-CAP]  149.1,107.7 180 top
C466  0.1uF  [0603-CAP]  164.85,110.49 180 top
C467  0.1uF  [0603-CAP]  164.85,106.3 180 top
C468  0.1uF  [0603-CAP]  175.01,110.49 0 top
C469  1uF  [0603-CAP]  164.85,109.09 180 top
C470  0.1uF  [0603-CAP]  164.85,107.7 180 top
C471  0.1uF  [0603-CAP]  180.59,110.49 180 top
C472  0.1uF  [0603-CAP]  180.59,106.3 180 top
C473  0.1uF  [0603-CAP]  190.75,110.49 0 top
C474  1uF  [0603-CAP]  180.59,109.09 180 top
C475  0.1uF  [0603-CAP]  180.59,107.7 180 top
C476  0.1uF  [0603-CAP]  196.34,110.49 180 top
C477  0.1uF  [0603-CAP]  196.34,106.3 180 top
C478  0.1uF  [0603-CAP]  206.5,110.49 0 top
C479  1uF  [0603-CAP]  196.34,109.09 180 top
C480  0.1uF  [0603-CAP]  196.34,107.7 180 top
C481  0.1uF  [0603-CAP]  212.09,110.49 180 top
C482  0.1uF  [0603-CAP]  212.09,106.3 180 top
C483  0.1uF  [0603-CAP]  222.25,110.49 0 top
C484  1uF  [0603-CAP]  212.09,109.09 180 top
C485  0.1uF  [0603-CAP]  212.09,107.7 180 top
C486  0.1uF  [0603-CAP]  227.84,110.49 180 top
C487  0.1uF  [0603-CAP]  227.84,106.3 180 top
C488  0.1uF  [0603-CAP]  238,110.49 0 top
C489  1uF  [0603-CAP]  227.84,109.09 180 top
C490  0.1uF  [0603-CAP]  227.84,107.7 180 top
E$1  [FIDUCIAL-1.5X3]  4.57,10.67 0 top
E$2  [FIDUCIAL-1X2]  242.95,11.94 0 top
E$3  [FIDUCIAL-1X2]  242.95,111.51 180 top
E$4  [FIDUCIAL-1X2]  119,11.94 0 top
E$5  [FIDUCIAL-1.5X3]  128.52,10.67 0 top
E$6  [FIDUCIAL-1X2]  119,111.51 180 top
FID1  FIDUCIAL1X2  [FIDUCIAL-1X2]  7.87,9.91 0 top
FID2  FIDUCIAL1X2  [FIDUCIAL-1X2]  17.02,21.08 0 top
FID3  FIDUCIAL1X2  [FIDUCIAL-1X2]  23.62,9.91 0 top
FID4  FIDUCIAL1X2  [FIDUCIAL-1X2]  32.77,21.08 0 top
FID5  FIDUCIAL1X2  [FIDUCIAL-1X2]  39.37,9.91 0 top
FID6  FIDUCIAL1X2  [FIDUCIAL-1X2]  48.51,21.08 0 top
FID7  FIDUCIAL1X2  [FIDUCIAL-1X2]  55.12,9.91 0 top
FID8  FIDUCIAL1X2  [FIDUCIAL-1X2]  64.26,21.08 0 top
FID9  FIDUCIAL1X2  [FIDUCIAL-1X2]  70.87,9.91 0 top
FID10  FIDUCIAL1X2  [FIDUCIAL-1X2]  80.01,21.08 0 top
FID11  FIDUCIAL1X2  [FIDUCIAL-1X2]  86.61,9.91 0 top
FID12  FIDUCIAL1X2  [FIDUCIAL-1X2]  95.76,21.08 0 top
FID13  FIDUCIAL1X2  [FIDUCIAL-1X2]  102.36,9.91 0 top
FID14  FIDUCIAL1X2  [FIDUCIAL-1X2]  111.51,21.08 0 top
FID15  FIDUCIAL1X2  [FIDUCIAL-1X2]  7.87,25.65 0 top
FID16  FIDUCIAL1X2  [FIDUCIAL-1X2]  17.02,36.83 0 top
FID17  FIDUCIAL1X2  [FIDUCIAL-1X2]  23.62,25.65 0 top
FID18  FIDUCIAL1X2  [FIDUCIAL-1X2]  32.77,36.83 0 top
FID19  FIDUCIAL1X2  [FIDUCIAL-1X2]  39.37,25.65 0 top
FID20  FIDUCIAL1X2  [FIDUCIAL-1X2]  48.51,36.83 0 top
FID21  FIDUCIAL1X2  [FIDUCIAL-1X2]  55.12,25.65 0 top
FID22  FIDUCIAL1X2  [FIDUCIAL-1X2]  64.26,36.83 0 top
FID23  FIDUCIAL1X2  [FIDUCIAL-1X2]  70.87,25.65 0 top
FID24  FIDUCIAL1X2  [FIDUCIAL-1X2]  80.01,36.83 0 top
FID25  FIDUCIAL1X2  [FIDUCIAL-1X2]  86.61,25.65 0 top
FID26  FIDUCIAL1X2  [FIDUCIAL-1X2]  95.76,36.83 0 top
FID27  FIDUCIAL1X2  [FIDUCIAL-1X2]  102.36,25.65 0 top
FID28  FIDUCIAL1X2  [FIDUCIAL-1X2]  111.51,36.83 0 top
FID29  FIDUCIAL1X2  [FIDUCIAL-1X2]  7.87,41.4 0 top
FID30  FIDUCIAL1X2  [FIDUCIAL-1X2]  17.02,52.58 0 top
FID31  FIDUCIAL1X2  [FIDUCIAL-1X2]  23.62,41.4 0 top
FID32  FIDUCIAL1X2  [FIDUCIAL-1X2]  32.77,52.58 0 top
FID33  FIDUCIAL1X2  [FIDUCIAL-1X2]  39.37,41.4 0 top
FID34  FIDUCIAL1X2  [FIDUCIAL-1X2]  48.51,52.58 0 top
FID35  FIDUCIAL1X2  [FIDUCIAL-1X2]  55.12,41.4 0 top
FID36  FIDUCIAL1X2  [FIDUCIAL-1X2]  64.26,52.58 0 top
FID37  FIDUCIAL1X2  [FIDUCIAL-1X2]  70.87,41.4 0 top
FID38  FIDUCIAL1X2  [FIDUCIAL-1X2]  80.01,52.58 0 top
FID39  FIDUCIAL1X2  [FIDUCIAL-1X2]  86.61,41.4 0 top
FID40  FIDUCIAL1X2  [FIDUCIAL-1X2]  95.76,52.58 0 top
FID41  FIDUCIAL1X2  [FIDUCIAL-1X2]  102.36,41.4 0 top
FID42  FIDUCIAL1X2  [FIDUCIAL-1X2]  111.51,52.58 0 top
FID43  FIDUCIAL1X2  [FIDUCIAL-1X2]  7.87,57.15 0 top
FID44  FIDUCIAL1X2  [FIDUCIAL-1X2]  17.02,68.33 0 top
FID45  FIDUCIAL1X2  [FIDUCIAL-1X2]  23.62,57.15 0 top
FID46  FIDUCIAL1X2  [FIDUCIAL-1X2]  32.77,68.33 0 top
FID47  FIDUCIAL1X2  [FIDUCIAL-1X2]  39.37,57.15 0 top
FID48  FIDUCIAL1X2  [FIDUCIAL-1X2]  48.51,68.33 0 top
FID49  FIDUCIAL1X2  [FIDUCIAL-1X2]  55.12,57.15 0 top
FID50  FIDUCIAL1X2  [FIDUCIAL-1X2]  64.26,68.33 0 top
FID51  FIDUCIAL1X2  [FIDUCIAL-1X2]  70.87,57.15 0 top
FID52  FIDUCIAL1X2  [FIDUCIAL-1X2]  80.01,68.33 0 top
FID53  FIDUCIAL1X2  [FIDUCIAL-1X2]  86.61,57.15 0 top
FID54  FIDUCIAL1X2  [FIDUCIAL-1X2]  95.76,68.33 0 top
FID55  FIDUCIAL1X2  [FIDUCIAL-1X2]  102.36,57.15 0 top
FID56  FIDUCIAL1X2  [FIDUCIAL-1X2]  111.51,68.33 0 top
FID57  FIDUCIAL1X2  [FIDUCIAL-1X2]  7.87,72.9 0 top
FID58  FIDUCIAL1X2  [FIDUCIAL-1X2]  17.02,84.07 0 top
FID59  FIDUCIAL1X2  [FIDUCIAL-1X2]  23.62,72.9 0 top
FID60  FIDUCIAL1X2  [FIDUCIAL-1X2]  32.77,84.07 0 top
FID61  FIDUCIAL1X2  [FIDUCIAL-1X2]  39.37,72.9 0 top
FID62  FIDUCIAL1X2  [FIDUCIAL-1X2]  48.51,84.07 0 top
FID63  FIDUCIAL1X2  [FIDUCIAL-1X2]  55.12,72.9 0 top
FID64  FIDUCIAL1X2  [FIDUCIAL-1X2]  64.26,84.07 0 top
FID65  FIDUCIAL1X2  [FIDUCIAL-1X2]  70.87,72.9 0 top
FID66  FIDUCIAL1X2  [FIDUCIAL-1X2]  80.01,84.07 0 top
FID67  FIDUCIAL1X2  [FIDUCIAL-1X2]  86.61,72.9 0 top
FID68  FIDUCIAL1X2  [FIDUCIAL-1X2]  95.76,84.07 0 top
FID69  FIDUCIAL1X2  [FIDUCIAL-1X2]  102.36,72.9 0 top
FID70  FIDUCIAL1X2  [FIDUCIAL-1X2]  111.51,84.07 0 top
FID71  FIDUCIAL1X2  [FIDUCIAL-1X2]  7.87,88.65 0 top
FID72  FIDUCIAL1X2  [FIDUCIAL-1X2]  17.02,99.82 0 top
FID73  FIDUCIAL1X2  [FIDUCIAL-1X2]  23.62,88.65 0 top
FID74  FIDUCIAL1X2  [FIDUCIAL-1X2]  32.77,99.82 0 top
FID75  FIDUCIAL1X2  [FIDUCIAL-1X2]  39.37,88.65 0 top
FID76  FIDUCIAL1X2  [FIDUCIAL-1X2]  48.51,99.82 0 top
FID77  FIDUCIAL1X2  [FIDUCIAL-1X2]  55.12,88.65 0 top
FID78  FIDUCIAL1X2  [FIDUCIAL-1X2]  64.26,99.82 0 top
FID79  FIDUCIAL1X2  [FIDUCIAL-1X2]  70.87,88.65 0 top
FID80  FIDUCIAL1X2  [FIDUCIAL-1X2]  80.01,99.82 0 top
FID81  FIDUCIAL1X2  [FIDUCIAL-1X2]  86.61,88.65 0 top
FID82  FIDUCIAL1X2  [FIDUCIAL-1X2]  95.76,99.82 0 top
FID83  FIDUCIAL1X2  [FIDUCIAL-1X2]  102.36,88.65 0 top
FID84  FIDUCIAL1X2  [FIDUCIAL-1X2]  111.51,99.82 0 top
FID85  FIDUCIAL1X2  [FIDUCIAL-1X2]  7.87,104.39 0 top
FID86  FIDUCIAL1X2  [FIDUCIAL-1X2]  17.02,115.57 0 top
FID87  FIDUCIAL1X2  [FIDUCIAL-1X2]  23.62,104.39 0 top
FID88  FIDUCIAL1X2  [FIDUCIAL-1X2]  32.77,115.57 0 top
FID89  FIDUCIAL1X2  [FIDUCIAL-1X2]  39.37,104.39 0 top
FID90  FIDUCIAL1X2  [FIDUCIAL-1X2]  48.51,115.57 0 top
FID91  FIDUCIAL1X2  [FIDUCIAL-1X2]  55.12,104.39 0 top
FID92  FIDUCIAL1X2  [FIDUCIAL-1X2]  64.26,115.57 0 top
FID93  FIDUCIAL1X2  [FIDUCIAL-1X2]  70.87,104.39 0 top
FID94  FIDUCIAL1X2  [FIDUCIAL-1X2]  80.01,115.57 0 top
FID95  FIDUCIAL1X2  [FIDUCIAL-1X2]  86.61,104.39 0 top
FID96  FIDUCIAL1X2  [FIDUCIAL-1X2]  95.76,115.57 0 top
FID97  FIDUCIAL1X2  [FIDUCIAL-1X2]  102.36,104.39 0 top
FID98  FIDUCIAL1X2  [FIDUCIAL-1X2]  111.51,115.57 0 top
FID99  FIDUCIAL1X2  [FIDUCIAL-1X2]  131.83,9.91 0 top
FID100  FIDUCIAL1X2  [FIDUCIAL-1X2]  140.97,21.08 0 top
FID101  FIDUCIAL1X2  [FIDUCIAL-1X2]  147.57,9.91 0 top
FID102  FIDUCIAL1X2  [FIDUCIAL-1X2]  156.72,21.08 0 top
FID103  FIDUCIAL1X2  [FIDUCIAL-1X2]  163.32,9.91 0 top
FID104  FIDUCIAL1X2  [FIDUCIAL-1X2]  172.47,21.08 0 top
FID105  FIDUCIAL1X2  [FIDUCIAL-1X2]  179.07,9.91 0 top
FID106  FIDUCIAL1X2  [FIDUCIAL-1X2]  188.21,21.08 0 top
FID107  FIDUCIAL1X2  [FIDUCIAL-1X2]  194.82,9.91 0 top
FID108  FIDUCIAL1X2  [FIDUCIAL-1X2]  203.96,21.08 0 top
FID109  FIDUCIAL1X2  [FIDUCIAL-1X2]  210.57,9.91 0 top
FID110  FIDUCIAL1X2  [FIDUCIAL-1X2]  219.71,21.08 0 top
FID111  FIDUCIAL1X2  [FIDUCIAL-1X2]  226.31,9.91 0 top
FID112  FIDUCIAL1X2  [FIDUCIAL-1X2]  235.46,21.08 0 top
FID113  FIDUCIAL1X2  [FIDUCIAL-1X2]  131.83,25.65 0 top
FID114  FIDUCIAL1X2  [FIDUCIAL-1X2]  140.97,36.83 0 top
FID115  FIDUCIAL1X2  [FIDUCIAL-1X2]  147.57,25.65 0 top
FID116  FIDUCIAL1X2  [FIDUCIAL-1X2]  156.72,36.83 0 top
FID117  FIDUCIAL1X2  [FIDUCIAL-1X2]  163.32,25.65 0 top
FID118  FIDUCIAL1X2  [FIDUCIAL-1X2]  172.47,36.83 0 top
FID119  FIDUCIAL1X2  [FIDUCIAL-1X2]  179.07,25.65 0 top
FID120  FIDUCIAL1X2  [FIDUCIAL-1X2]  188.21,36.83 0 top
FID121  FIDUCIAL1X2  [FIDUCIAL-1X2]  194.82,25.65 0 top
FID122  FIDUCIAL1X2  [FIDUCIAL-1X2]  203.96,36.83 0 top
FID123  FIDUCIAL1X2  [FIDUCIAL-1X2]  210.57,25.65 0 top
FID124  FIDUCIAL1X2  [FIDUCIAL-1X2]  219.71,36.83 0 top
FID125  FIDUCIAL1X2  [FIDUCIAL-1X2]  226.31,25.65 0 top
FID126  FIDUCIAL1X2  [FIDUCIAL-1X2]  235.46,36.83 0 top
FID127  FIDUCIAL1X2  [FIDUCIAL-1X2]  131.83,41.4 0 top
FID128  FIDUCIAL1X2  [FIDUCIAL-1X2]  140.97,52.58 0 top
FID129  FIDUCIAL1X2  [FIDUCIAL-1X2]  147.57,41.4 0 top
FID130  FIDUCIAL1X2  [FIDUCIAL-1X2]  156.72,52.58 0 top
FID131  FIDUCIAL1X2  [FIDUCIAL-1X2]  163.32,41.4 0 top
FID132  FIDUCIAL1X2  [FIDUCIAL-1X2]  172.47,52.58 0 top
FID133  FIDUCIAL1X2  [FIDUCIAL-1X2]  179.07,41.4 0 top
FID134  FIDUCIAL1X2  [FIDUCIAL-1X2]  188.21,52.58 0 top
FID135  FIDUCIAL1X2  [FIDUCIAL-1X2]  194.82,41.4 0 top
FID136  FIDUCIAL1X2  [FIDUCIAL-1X2]  203.96,52.58 0 top
FID137  FIDUCIAL1X2  [FIDUCIAL-1X2]  210.57,41.4 0 top
FID138  FIDUCIAL1X2  [FIDUCIAL-1X2]  219.71,52.58 0 top
FID139  FIDUCIAL1X2  [FIDUCIAL-1X2]  226.31,41.4 0 top
FID140  FIDUCIAL1X2  [FIDUCIAL-1X2]  235.46,52.58 0 top
FID141  FIDUCIAL1X2  [FIDUCIAL-1X2]  131.83,57.15 0 top
FID142  FIDUCIAL1X2  [FIDUCIAL-1X2]  140.97,68.33 0 top
FID143  FIDUCIAL1X2  [FIDUCIAL-1X2]  147.57,57.15 0 top
FID144  FIDUCIAL1X2  [FIDUCIAL-1X2]  156.72,68.33 0 top
FID145  FIDUCIAL1X2  [FIDUCIAL-1X2]  163.32,57.15 0 top
FID146  FIDUCIAL1X2  [FIDUCIAL-1X2]  172.47,68.33 0 top
FID147  FIDUCIAL1X2  [FIDUCIAL-1X2]  179.07,57.15 0 top
FID148  FIDUCIAL1X2  [FIDUCIAL-1X2]  188.21,68.33 0 top
FID149  FIDUCIAL1X2  [FIDUCIAL-1X2]  194.82,57.15 0 top
FID150  FIDUCIAL1X2  [FIDUCIAL-1X2]  203.96,68.33 0 top
FID151  FIDUCIAL1X2  [FIDUCIAL-1X2]  210.57,57.15 0 top
FID152  FIDUCIAL1X2  [FIDUCIAL-1X2]  219.71,68.33 0 top
FID153  FIDUCIAL1X2  [FIDUCIAL-1X2]  226.31,57.15 0 top
FID154  FIDUCIAL1X2  [FIDUCIAL-1X2]  235.46,68.33 0 top
FID155  FIDUCIAL1X2  [FIDUCIAL-1X2]  131.83,72.9 0 top
FID156  FIDUCIAL1X2  [FIDUCIAL-1X2]  140.97,84.07 0 top
FID157  FIDUCIAL1X2  [FIDUCIAL-1X2]  147.57,72.9 0 top
FID158  FIDUCIAL1X2  [FIDUCIAL-1X2]  156.72,84.07 0 top
FID159  FIDUCIAL1X2  [FIDUCIAL-1X2]  163.32,72.9 0 top
FID160  FIDUCIAL1X2  [FIDUCIAL-1X2]  172.47,84.07 0 top
FID161  FIDUCIAL1X2  [FIDUCIAL-1X2]  179.07,72.9 0 top
FID162  FIDUCIAL1X2  [FIDUCIAL-1X2]  188.21,84.07 0 top
FID163  FIDUCIAL1X2  [FIDUCIAL-1X2]  194.82,72.9 0 top
FID164  FIDUCIAL1X2  [FIDUCIAL-1X2]  203.96,84.07 0 top
FID165  FIDUCIAL1X2  [FIDUCIAL-1X2]  210.57,72.9 0 top
FID166  FIDUCIAL1X2  [FIDUCIAL-1X2]  219.71,84.07 0 top
FID167  FIDUCIAL1X2  [FIDUCIAL-1X2]  226.31,72.9 0 top
FID168  FIDUCIAL1X2  [FIDUCIAL-1X2]  235.46,84.07 0 top
FID169  FIDUCIAL1X2  [FIDUCIAL-1X2]  131.83,88.65 0 top
FID170  FIDUCIAL1X2  [FIDUCIAL-1X2]  140.97,99.82 0 top
FID171  FIDUCIAL1X2  [FIDUCIAL-1X2]  147.57,88.65 0 top
FID172  FIDUCIAL1X2  [FIDUCIAL-1X2]  156.72,99.82 0 top
FID173  FIDUCIAL1X2  [FIDUCIAL-1X2]  163.32,88.65 0 top
FID174  FIDUCIAL1X2  [FIDUCIAL-1X2]  172.47,99.82 0 top
FID175  FIDUCIAL1X2  [FIDUCIAL-1X2]  179.07,88.65 0 top
FID176  FIDUCIAL1X2  [FIDUCIAL-1X2]  188.21,99.82 0 top
FID177  FIDUCIAL1X2  [FIDUCIAL-1X2]  194.82,88.65 0 top
FID178  FIDUCIAL1X2  [FIDUCIAL-1X2]  203.96,99.82 0 top
FID179  FIDUCIAL1X2  [FIDUCIAL-1X2]  210.57,88.65 0 top
FID180  FIDUCIAL1X2  [FIDUCIAL-1X2]  219.71,99.82 0 top
FID181  FIDUCIAL1X2  [FIDUCIAL-1X2]  226.31,88.65 0 top
FID182  FIDUCIAL1X2  [FIDUCIAL-1X2]  235.46,99.82 0 top
FID183  FIDUCIAL1X2  [FIDUCIAL-1X2]  131.83,104.39 0 top
FID184  FIDUCIAL1X2  [FIDUCIAL-1X2]  140.97,115.57 0 top
FID185  FIDUCIAL1X2  [FIDUCIAL-1X2]  147.57,104.39 0 top
FID186  FIDUCIAL1X2  [FIDUCIAL-1X2]  156.72,115.57 0 top
FID187  FIDUCIAL1X2  [FIDUCIAL-1X2]  163.32,104.39 0 top
FID188  FIDUCIAL1X2  [FIDUCIAL-1X2]  172.47,115.57 0 top
FID189  FIDUCIAL1X2  [FIDUCIAL-1X2]  179.07,104.39 0 top
FID190  FIDUCIAL1X2  [FIDUCIAL-1X2]  188.21,115.57 0 top
FID191  FIDUCIAL1X2  [FIDUCIAL-1X2]  194.82,104.39 0 top
FID192  FIDUCIAL1X2  [FIDUCIAL-1X2]  203.96,115.57 0 top
FID193  FIDUCIAL1X2  [FIDUCIAL-1X2]  210.57,104.39 0 top
FID194  FIDUCIAL1X2  [FIDUCIAL-1X2]  219.71,115.57 0 top
FID195  FIDUCIAL1X2  [FIDUCIAL-1X2]  226.31,104.39 0 top
FID196  FIDUCIAL1X2  [FIDUCIAL-1X2]  235.46,115.57 0 top
JP1  breakout  [1X05]  9.4,8.13 180 bottom
JP2  STAND-OFF  [STAND-OFF]  9.4,19.56 0 top
JP3  STAND-OFF  [STAND-OFF]  19.56,19.56 0 top
JP4  LOGO-SFESK  [SFE-LOGO-FLAME]  10.21,13.77 0 bottom
JP5  breakout  [1X05]  25.15,8.13 180 bottom
JP6  STAND-OFF  [STAND-OFF]  25.15,19.56 0 top
JP7  LOGO-SFESK  [SFE-LOGO-FLAME]  13.54,10.59 0 top
JP8  STAND-OFF  [STAND-OFF]  35.31,19.56 0 top
JP9  LOGO-SFESK  [SFE-LOGO-FLAME]  25.96,13.77 0 bottom
JP10  LOGO-SFESK  [SFE-LOGO-FLAME]  29.29,10.59 0 top
JP11  breakout  [1X05]  40.89,8.13 180 bottom
JP12  STAND-OFF  [STAND-OFF]  40.89,19.56 0 top
JP13  STAND-OFF  [STAND-OFF]  51.05,19.56 0 top
JP14  LOGO-SFESK  [SFE-LOGO-FLAME]  41.71,13.77 0 bottom
JP15  LOGO-SFESK  [SFE-LOGO-FLAME]  45.03,10.59 0 top
JP16  breakout  [1X05]  56.64,8.13 180 bottom
JP17  STAND-OFF  [STAND-OFF]  56.64,19.56 0 top
JP18  STAND-OFF  [STAND-OFF]  66.8,19.56 0 top
JP19  LOGO-SFESK  [SFE-LOGO-FLAME]  57.45,13.77 0 bottom
JP20  LOGO-SFESK  [SFE-LOGO-FLAME]  60.78,10.59 0 top
JP21  breakout  [1X05]  72.39,8.13 180 bottom
JP22  STAND-OFF  [STAND-OFF]  72.39,19.56 0 top
JP23  STAND-OFF  [STAND-OFF]  82.55,19.56 0 top
JP24  LOGO-SFESK  [SFE-LOGO-FLAME]  73.2,13.77 0 bottom
JP25  LOGO-SFESK  [SFE-LOGO-FLAME]  76.53,10.59 0 top
JP26  breakout  [1X05]  88.14,8.13 180 bottom
JP27  STAND-OFF  [STAND-OFF]  88.14,19.56 0 top
JP28  STAND-OFF  [STAND-OFF]  98.3,19.56 0 top
JP29  LOGO-SFESK  [SFE-LOGO-FLAME]  88.95,13.77 0 bottom
JP30  LOGO-SFESK  [SFE-LOGO-FLAME]  92.28,10.59 0 top
JP31  breakout  [1X05]  103.89,8.13 180 bottom
JP32  STAND-OFF  [STAND-OFF]  103.89,19.56 0 top
JP33  STAND-OFF  [STAND-OFF]  114.05,19.56 0 top
JP34  LOGO-SFESK  [SFE-LOGO-FLAME]  104.7,13.77 0 bottom
JP35  LOGO-SFESK  [SFE-LOGO-FLAME]  108.03,10.59 0 top
JP36  breakout  [1X05]  9.4,23.88 180 bottom
JP37  STAND-OFF  [STAND-OFF]  9.4,35.31 0 top
JP38  STAND-OFF  [STAND-OFF]  19.56,35.31 0 top
JP39  LOGO-SFESK  [SFE-LOGO-FLAME]  10.21,29.51 0 bottom
JP40  LOGO-SFESK  [SFE-LOGO-FLAME]  13.54,26.34 0 top
JP41  breakout  [1X05]  25.15,23.88 180 bottom
JP42  STAND-OFF  [STAND-OFF]  25.15,35.31 0 top
JP43  STAND-OFF  [STAND-OFF]  35.31,35.31 0 top
JP44  LOGO-SFESK  [SFE-LOGO-FLAME]  25.96,29.51 0 bottom
JP45  LOGO-SFESK  [SFE-LOGO-FLAME]  29.29,26.34 0 top
JP46  breakout  [1X05]  40.89,23.88 180 bottom
JP47  STAND-OFF  [STAND-OFF]  40.89,35.31 0 top
JP48  STAND-OFF  [STAND-OFF]  51.05,35.31 0 top
JP49  LOGO-SFESK  [SFE-LOGO-FLAME]  41.71,29.51 0 bottom
JP50  LOGO-SFESK  [SFE-LOGO-FLAME]  45.03,26.34 0 top
JP51  breakout  [1X05]  56.64,23.88 180 bottom
JP52  STAND-OFF  [STAND-OFF]  56.64,35.31 0 top
JP53  STAND-OFF  [STAND-OFF]  66.8,35.31 0 top
JP54  LOGO-SFESK  [SFE-LOGO-FLAME]  57.45,29.51 0 bottom
JP55  LOGO-SFESK  [SFE-LOGO-FLAME]  60.78,26.34 0 top
JP56  breakout  [1X05]  72.39,23.88 180 bottom
JP57  STAND-OFF  [STAND-OFF]  72.39,35.31 0 top
JP58  STAND-OFF  [STAND-OFF]  82.55,35.31 0 top
JP59  LOGO-SFESK  [SFE-LOGO-FLAME]  73.2,29.51 0 bottom
JP60  LOGO-SFESK  [SFE-LOGO-FLAME]  76.53,26.34 0 top
JP61  breakout  [1X05]  88.14,23.88 180 bottom
JP62  STAND-OFF  [STAND-OFF]  88.14,35.31 0 top
JP63  STAND-OFF  [STAND-OFF]  98.3,35.31 0 top
JP64  LOGO-SFESK  [SFE-LOGO-FLAME]  88.95,29.51 0 bottom
JP65  LOGO-SFESK  [SFE-LOGO-FLAME]  92.28,26.34 0 top
JP66  breakout  [1X05]  103.89,23.88 180 bottom
JP67  STAND-OFF  [STAND-OFF]  103.89,35.31 0 top
JP68  STAND-OFF  [STAND-OFF]  114.05,35.31 0 top
JP69  LOGO-SFESK  [SFE-LOGO-FLAME]  104.7,29.51 0 bottom
JP70  LOGO-SFESK  [SFE-LOGO-FLAME]  108.03,26.34 0 top
JP71  breakout  [1X05]  9.4,39.62 180 bottom
JP72  STAND-OFF  [STAND-OFF]  9.4,51.05 0 top
JP73  STAND-OFF  [STAND-OFF]  19.56,51.05 0 top
JP74  LOGO-SFESK  [SFE-LOGO-FLAME]  10.21,45.26 0 bottom
JP75  LOGO-SFESK  [SFE-LOGO-FLAME]  13.54,42.09 0 top
JP76  breakout  [1X05]  25.15,39.62 180 bottom
JP77  STAND-OFF  [STAND-OFF]  25.15,51.05 0 top
JP78  STAND-OFF  [STAND-OFF]  35.31,51.05 0 top
JP79  LOGO-SFESK  [SFE-LOGO-FLAME]  25.96,45.26 0 bottom
JP80  LOGO-SFESK  [SFE-LOGO-FLAME]  29.29,42.09 0 top
JP81  breakout  [1X05]  40.89,39.62 180 bottom
JP82  STAND-OFF  [STAND-OFF]  40.89,51.05 0 top
JP83  STAND-OFF  [STAND-OFF]  51.05,51.05 0 top
JP84  LOGO-SFESK  [SFE-LOGO-FLAME]  41.71,45.26 0 bottom
JP85  LOGO-SFESK  [SFE-LOGO-FLAME]  45.03,42.09 0 top
JP86  breakout  [1X05]  56.64,39.62 180 bottom
JP87  STAND-OFF  [STAND-OFF]  56.64,51.05 0 top
JP88  STAND-OFF  [STAND-OFF]  66.8,51.05 0 top
JP89  LOGO-SFESK  [SFE-LOGO-FLAME]  57.45,45.26 0 bottom
JP90  LOGO-SFESK  [SFE-LOGO-FLAME]  60.78,42.09 0 top
JP91  breakout  [1X05]  72.39,39.62 180 bottom
JP92  STAND-OFF  [STAND-OFF]  72.39,51.05 0 top
JP93  STAND-OFF  [STAND-OFF]  82.55,51.05 0 top
JP94  LOGO-SFESK  [SFE-LOGO-FLAME]  73.2,45.26 0 bottom
JP95  LOGO-SFESK  [SFE-LOGO-FLAME]  76.53,42.09 0 top
JP96  breakout  [1X05]  88.14,39.62 180 bottom
JP97  STAND-OFF  [STAND-OFF]  88.14,51.05 0 top
JP98  STAND-OFF  [STAND-OFF]  98.3,51.05 0 top
JP99  LOGO-SFESK  [SFE-LOGO-FLAME]  88.95,45.26 0 bottom
JP100  LOGO-SFESK  [SFE-LOGO-FLAME]  92.28,42.09 0 top
JP101  breakout  [1X05]  103.89,39.62 180 bottom
JP102  STAND-OFF  [STAND-OFF]  103.89,51.05 0 top
JP103  STAND-OFF  [STAND-OFF]  114.05,51.05 0 top
JP104  LOGO-SFESK  [SFE-LOGO-FLAME]  104.7,45.26 0 bottom
JP105  LOGO-SFESK  [SFE-LOGO-FLAME]  108.03,42.09 0 top
JP106  breakout  [1X05]  9.4,55.37 180 bottom
JP107  STAND-OFF  [STAND-OFF]  9.4,66.8 0 top
JP108  STAND-OFF  [STAND-OFF]  19.56,66.8 0 top
JP109  LOGO-SFESK  [SFE-LOGO-FLAME]  10.21,61.01 0 bottom
JP110  LOGO-SFESK  [SFE-LOGO-FLAME]  13.54,57.84 0 top
JP111  breakout  [1X05]  25.15,55.37 180 bottom
JP112  STAND-OFF  [STAND-OFF]  25.15,66.8 0 top
JP113  STAND-OFF  [STAND-OFF]  35.31,66.8 0 top
JP114  LOGO-SFESK  [SFE-LOGO-FLAME]  25.96,61.01 0 bottom
JP115  LOGO-SFESK  [SFE-LOGO-FLAME]  29.29,57.84 0 top
JP116  breakout  [1X05]  40.89,55.37 180 bottom
JP117  STAND-OFF  [STAND-OFF]  40.89,66.8 0 top
JP118  STAND-OFF  [STAND-OFF]  51.05,66.8 0 top
JP119  LOGO-SFESK  [SFE-LOGO-FLAME]  41.71,61.01 0 bottom
JP120  LOGO-SFESK  [SFE-LOGO-FLAME]  45.03,57.84 0 top
JP121  breakout  [1X05]  56.64,55.37 180 bottom
JP122  STAND-OFF  [STAND-OFF]  56.64,66.8 0 top
JP123  STAND-OFF  [STAND-OFF]  66.8,66.8 0 top
JP124  LOGO-SFESK  [SFE-LOGO-FLAME]  57.45,61.01 0 bottom
JP125  LOGO-SFESK  [SFE-LOGO-FLAME]  60.78,57.84 0 top
JP126  breakout  [1X05]  72.39,55.37 180 bottom
JP127  STAND-OFF  [STAND-OFF]  72.39,66.8 0 top
JP128  STAND-OFF  [STAND-OFF]  82.55,66.8 0 top
JP129  LOGO-SFESK  [SFE-LOGO-FLAME]  73.2,61.01 0 bottom
JP130  LOGO-SFESK  [SFE-LOGO-FLAME]  76.53,57.84 0 top
JP131  breakout  [1X05]  88.14,55.37 180 bottom
JP132  STAND-OFF  [STAND-OFF]  88.14,66.8 0 top
JP133  STAND-OFF  [STAND-OFF]  98.3,66.8 0 top
JP134  LOGO-SFESK  [SFE-LOGO-FLAME]  88.95,61.01 0 bottom
JP135  LOGO-SFESK  [SFE-LOGO-FLAME]  92.28,57.84 0 top
JP136  breakout  [1X05]  103.89,55.37 180 bottom
JP137  STAND-OFF  [STAND-OFF]  103.89,66.8 0 top
JP138  STAND-OFF  [STAND-OFF]  114.05,66.8 0 top
JP139  LOGO-SFESK  [SFE-LOGO-FLAME]  104.7,61.01 0 bottom
JP140  LOGO-SFESK  [SFE-LOGO-FLAME]  108.03,57.84 0 top
JP141  breakout  [1X05]  9.4,71.12 180 bottom
JP142  STAND-OFF  [STAND-OFF]  9.4,82.55 0 top
JP143  STAND-OFF  [STAND-OFF]  19.56,82.55 0 top
JP144  LOGO-SFESK  [SFE-LOGO-FLAME]  10.21,76.76 0 bottom
JP145  LOGO-SFESK  [SFE-LOGO-FLAME]  13.54,73.58 0 top
JP146  breakout  [1X05]  25.15,71.12 180 bottom
JP147  STAND-OFF  [STAND-OFF]  25.15,82.55 0 top
JP148  STAND-OFF  [STAND-OFF]  35.31,82.55 0 top
JP149  LOGO-SFESK  [SFE-LOGO-FLAME]  25.96,76.76 0 bottom
JP150  LOGO-SFESK  [SFE-LOGO-FLAME]  29.29,73.58 0 top
JP151  breakout  [1X05]  40.89,71.12 180 bottom
JP152  STAND-OFF  [STAND-OFF]  40.89,82.55 0 top
JP153  STAND-OFF  [STAND-OFF]  51.05,82.55 0 top
JP154  LOGO-SFESK  [SFE-LOGO-FLAME]  41.71,76.76 0 bottom
JP155  LOGO-SFESK  [SFE-LOGO-FLAME]  45.03,73.58 0 top
JP156  breakout  [1X05]  56.64,71.12 180 bottom
JP157  STAND-OFF  [STAND-OFF]  56.64,82.55 0 top
JP158  STAND-OFF  [STAND-OFF]  66.8,82.55 0 top
JP159  LOGO-SFESK  [SFE-LOGO-FLAME]  57.45,76.76 0 bottom
JP160  LOGO-SFESK  [SFE-LOGO-FLAME]  60.78,73.58 0 top
JP161  breakout  [1X05]  72.39,71.12 180 bottom
JP162  STAND-OFF  [STAND-OFF]  72.39,82.55 0 top
JP163  STAND-OFF  [STAND-OFF]  82.55,82.55 0 top
JP164  LOGO-SFESK  [SFE-LOGO-FLAME]  73.2,76.76 0 bottom
JP165  LOGO-SFESK  [SFE-LOGO-FLAME]  76.53,73.58 0 top
JP166  breakout  [1X05]  88.14,71.12 180 bottom
JP167  STAND-OFF  [STAND-OFF]  88.14,82.55 0 top
JP168  STAND-OFF  [STAND-OFF]  98.3,82.55 0 top
JP169  LOGO-SFESK  [SFE-LOGO-FLAME]  88.95,76.76 0 bottom
JP170  LOGO-SFESK  [SFE-LOGO-FLAME]  92.28,73.58 0 top
JP171  breakout  [1X05]  103.89,71.12 180 bottom
JP172  STAND-OFF  [STAND-OFF]  103.89,82.55 0 top
JP173  STAND-OFF  [STAND-OFF]  114.05,82.55 0 top
JP174  LOGO-SFESK  [SFE-LOGO-FLAME]  104.7,76.76 0 bottom
JP175  LOGO-SFESK  [SFE-LOGO-FLAME]  108.03,73.58 0 top
JP176  breakout  [1X05]  9.4,86.87 180 bottom
JP177  STAND-OFF  [STAND-OFF]  9.4,98.3 0 top
JP178  STAND-OFF  [STAND-OFF]  19.56,98.3 0 top
JP179  LOGO-SFESK  [SFE-LOGO-FLAME]  10.21,92.51 0 bottom
JP180  LOGO-SFESK  [SFE-LOGO-FLAME]  13.54,89.33 0 top
JP181  breakout  [1X05]  25.15,86.87 180 bottom
JP182  STAND-OFF  [STAND-OFF]  25.15,98.3 0 top
JP183  STAND-OFF  [STAND-OFF]  35.31,98.3 0 top
JP184  LOGO-SFESK  [SFE-LOGO-FLAME]  25.96,92.51 0 bottom
JP185  LOGO-SFESK  [SFE-LOGO-FLAME]  29.29,89.33 0 top
JP186  breakout  [1X05]  40.89,86.87 180 bottom
JP187  STAND-OFF  [STAND-OFF]  40.89,98.3 0 top
JP188  STAND-OFF  [STAND-OFF]  51.05,98.3 0 top
JP189  LOGO-SFESK  [SFE-LOGO-FLAME]  41.71,92.51 0 bottom
JP190  LOGO-SFESK  [SFE-LOGO-FLAME]  45.03,89.33 0 top
JP191  breakout  [1X05]  56.64,86.87 180 bottom
JP192  STAND-OFF  [STAND-OFF]  56.64,98.3 0 top
JP193  STAND-OFF  [STAND-OFF]  66.8,98.3 0 top
JP194  LOGO-SFESK  [SFE-LOGO-FLAME]  57.45,92.51 0 bottom
JP195  LOGO-SFESK  [SFE-LOGO-FLAME]  60.78,89.33 0 top
JP196  breakout  [1X05]  72.39,86.87 180 bottom
JP197  STAND-OFF  [STAND-OFF]  72.39,98.3 0 top
JP198  STAND-OFF  [STAND-OFF]  82.55,98.3 0 top
JP199  LOGO-SFESK  [SFE-LOGO-FLAME]  73.2,92.51 0 bottom
JP200  LOGO-SFESK  [SFE-LOGO-FLAME]  76.53,89.33 0 top
JP201  breakout  [1X05]  88.14,86.87 180 bottom
JP202  STAND-OFF  [STAND-OFF]  88.14,98.3 0 top
JP203  STAND-OFF  [STAND-OFF]  98.3,98.3 0 top
JP204  LOGO-SFESK  [SFE-LOGO-FLAME]  88.95,92.51 0 bottom
JP205  LOGO-SFESK  [SFE-LOGO-FLAME]  92.28,89.33 0 top
JP206  breakout  [1X05]  103.89,86.87 180 bottom
JP207  STAND-OFF  [STAND-OFF]  103.89,98.3 0 top
JP208  STAND-OFF  [STAND-OFF]  114.05,98.3 0 top
JP209  LOGO-SFESK  [SFE-LOGO-FLAME]  104.7,92.51 0 bottom
JP210  LOGO-SFESK  [SFE-LOGO-FLAME]  108.03,89.33 0 top
JP211  breakout  [1X05]  9.4,102.62 180 bottom
JP212  STAND-OFF  [STAND-OFF]  9.4,114.05 0 top
JP213  STAND-OFF  [STAND-OFF]  19.56,114.05 0 top
JP214  LOGO-SFESK  [SFE-LOGO-FLAME]  10.21,108.25 0 bottom
JP215  LOGO-SFESK  [SFE-LOGO-FLAME]  13.54,105.08 0 top
JP216  breakout  [1X05]  25.15,102.62 180 bottom
JP217  STAND-OFF  [STAND-OFF]  25.15,114.05 0 top
JP218  STAND-OFF  [STAND-OFF]  35.31,114.05 0 top
JP219  LOGO-SFESK  [SFE-LOGO-FLAME]  25.96,108.25 0 bottom
JP220  LOGO-SFESK  [SFE-LOGO-FLAME]  29.29,105.08 0 top
JP221  breakout  [1X05]  40.89,102.62 180 bottom
JP222  STAND-OFF  [STAND-OFF]  40.89,114.05 0 top
JP223  STAND-OFF  [STAND-OFF]  51.05,114.05 0 top
JP224  LOGO-SFESK  [SFE-LOGO-FLAME]  41.71,108.25 0 bottom
JP225  LOGO-SFESK  [SFE-LOGO-FLAME]  45.03,105.08 0 top
JP226  breakout  [1X05]  56.64,102.62 180 bottom
JP227  STAND-OFF  [STAND-OFF]  56.64,114.05 0 top
JP228  STAND-OFF  [STAND-OFF]  66.8,114.05 0 top
JP229  LOGO-SFESK  [SFE-LOGO-FLAME]  57.45,108.25 0 bottom
JP230  LOGO-SFESK  [SFE-LOGO-FLAME]  60.78,105.08 0 top
JP231  breakout  [1X05]  72.39,102.62 180 bottom
JP232  STAND-OFF  [STAND-OFF]  72.39,114.05 0 top
JP233  STAND-OFF  [STAND-OFF]  82.55,114.05 0 top
JP234  LOGO-SFESK  [SFE-LOGO-FLAME]  73.2,108.25 0 bottom
JP235  LOGO-SFESK  [SFE-LOGO-FLAME]  76.53,105.08 0 top
JP236  breakout  [1X05]  88.14,102.62 180 bottom
JP237  STAND-OFF  [STAND-OFF]  88.14,114.05 0 top
JP238  STAND-OFF  [STAND-OFF]  98.3,114.05 0 top
JP239  LOGO-SFESK  [SFE-LOGO-FLAME]  88.95,108.25 0 bottom
JP240  LOGO-SFESK  [SFE-LOGO-FLAME]  92.28,105.08 0 top
JP241  breakout  [1X05]  103.89,102.62 180 bottom
JP242  STAND-OFF  [STAND-OFF]  103.89,114.05 0 top
JP243  STAND-OFF  [STAND-OFF]  114.05,114.05 0 top
JP244  LOGO-SFESK  [SFE-LOGO-FLAME]  104.7,108.25 0 bottom
JP245  LOGO-SFESK  [SFE-LOGO-FLAME]  108.03,105.08 0 top
JP246  breakout  [1X05]  133.35,8.13 180 bottom
JP247  STAND-OFF  [STAND-OFF]  133.35,19.56 0 top
JP248  STAND-OFF  [STAND-OFF]  143.51,19.56 0 top
JP249  LOGO-SFESK  [SFE-LOGO-FLAME]  134.16,13.77 0 bottom
JP250  LOGO-SFESK  [SFE-LOGO-FLAME]  137.49,10.59 0 top
JP251  breakout  [1X05]  149.1,8.13 180 bottom
JP252  STAND-OFF  [STAND-OFF]  149.1,19.56 0 top
JP253  STAND-OFF  [STAND-OFF]  159.26,19.56 0 top
JP254  LOGO-SFESK  [SFE-LOGO-FLAME]  149.91,13.77 0 bottom
JP255  LOGO-SFESK  [SFE-LOGO-FLAME]  153.24,10.59 0 top
JP256  breakout  [1X05]  164.85,8.13 180 bottom
JP257  STAND-OFF  [STAND-OFF]  164.85,19.56 0 top
JP258  STAND-OFF  [STAND-OFF]  175.01,19.56 0 top
JP259  LOGO-SFESK  [SFE-LOGO-FLAME]  165.66,13.77 0 bottom
JP260  LOGO-SFESK  [SFE-LOGO-FLAME]  168.99,10.59 0 top
JP261  breakout  [1X05]  180.59,8.13 180 bottom
JP262  STAND-OFF  [STAND-OFF]  180.59,19.56 0 top
JP263  STAND-OFF  [STAND-OFF]  190.75,19.56 0 top
JP264  LOGO-SFESK  [SFE-LOGO-FLAME]  181.41,13.77 0 bottom
JP265  LOGO-SFESK  [SFE-LOGO-FLAME]  184.73,10.59 0 top
JP266  breakout  [1X05]  196.34,8.13 180 bottom
JP267  STAND-OFF  [STAND-OFF]  196.34,19.56 0 top
JP268  STAND-OFF  [STAND-OFF]  206.5,19.56 0 top
JP269  LOGO-SFESK  [SFE-LOGO-FLAME]  197.15,13.77 0 bottom
JP270  LOGO-SFESK  [SFE-LOGO-FLAME]  200.48,10.59 0 top
JP271  breakout  [1X05]  212.09,8.13 180 bottom
JP272  STAND-OFF  [STAND-OFF]  212.09,19.56 0 top
JP273  STAND-OFF  [STAND-OFF]  222.25,19.56 0 top
JP274  LOGO-SFESK  [SFE-LOGO-FLAME]  212.9,13.77 0 bottom
JP275  LOGO-SFESK  [SFE-LOGO-FLAME]  216.23,10.59 0 top
JP276  breakout  [1X05]  227.84,8.13 180 bottom
JP277  STAND-OFF  [STAND-OFF]  227.84,19.56 0 top
JP278  STAND-OFF  [STAND-OFF]  238,19.56 0 top
JP279  LOGO-SFESK  [SFE-LOGO-FLAME]  228.65,13.77 0 bottom
JP280  LOGO-SFESK  [SFE-LOGO-FLAME]  231.98,10.59 0 top
JP281  breakout  [1X05]  133.35,23.88 180 bottom
JP282  STAND-OFF  [STAND-OFF]  133.35,35.31 0 top
JP283  STAND-OFF  [STAND-OFF]  143.51,35.31 0 top
JP284  LOGO-SFESK  [SFE-LOGO-FLAME]  134.16,29.51 0 bottom
JP285  LOGO-SFESK  [SFE-LOGO-FLAME]  137.49,26.34 0 top
JP286  breakout  [1X05]  149.1,23.88 180 bottom
JP287  STAND-OFF  [STAND-OFF]  149.1,35.31 0 top
JP288  STAND-OFF  [STAND-OFF]  159.26,35.31 0 top
JP289  LOGO-SFESK  [SFE-LOGO-FLAME]  149.91,29.51 0 bottom
JP290  LOGO-SFESK  [SFE-LOGO-FLAME]  153.24,26.34 0 top
JP291  breakout  [1X05]  164.85,23.88 180 bottom
JP292  STAND-OFF  [STAND-OFF]  164.85,35.31 0 top
JP293  STAND-OFF  [STAND-OFF]  175.01,35.31 0 top
JP294  LOGO-SFESK  [SFE-LOGO-FLAME]  165.66,29.51 0 bottom
JP295  LOGO-SFESK  [SFE-LOGO-FLAME]  168.99,26.34 0 top
JP296  breakout  [1X05]  180.59,23.88 180 bottom
JP297  STAND-OFF  [STAND-OFF]  180.59,35.31 0 top
JP298  STAND-OFF  [STAND-OFF]  190.75,35.31 0 top
JP299  LOGO-SFESK  [SFE-LOGO-FLAME]  181.41,29.51 0 bottom
JP300  LOGO-SFESK  [SFE-LOGO-FLAME]  184.73,26.34 0 top
JP301  breakout  [1X05]  196.34,23.88 180 bottom